# Altium PCB PCB5.PcbDoc
Units mm, origin at the board's own origin, x right, y up, seen from the top; angles counter-clockwise.
Board outline 22 x 21.75 mm, 2 copper layers (Top Layer, Bottom Layer); 20 components, 13 nets, 57 pads, 6 vias.
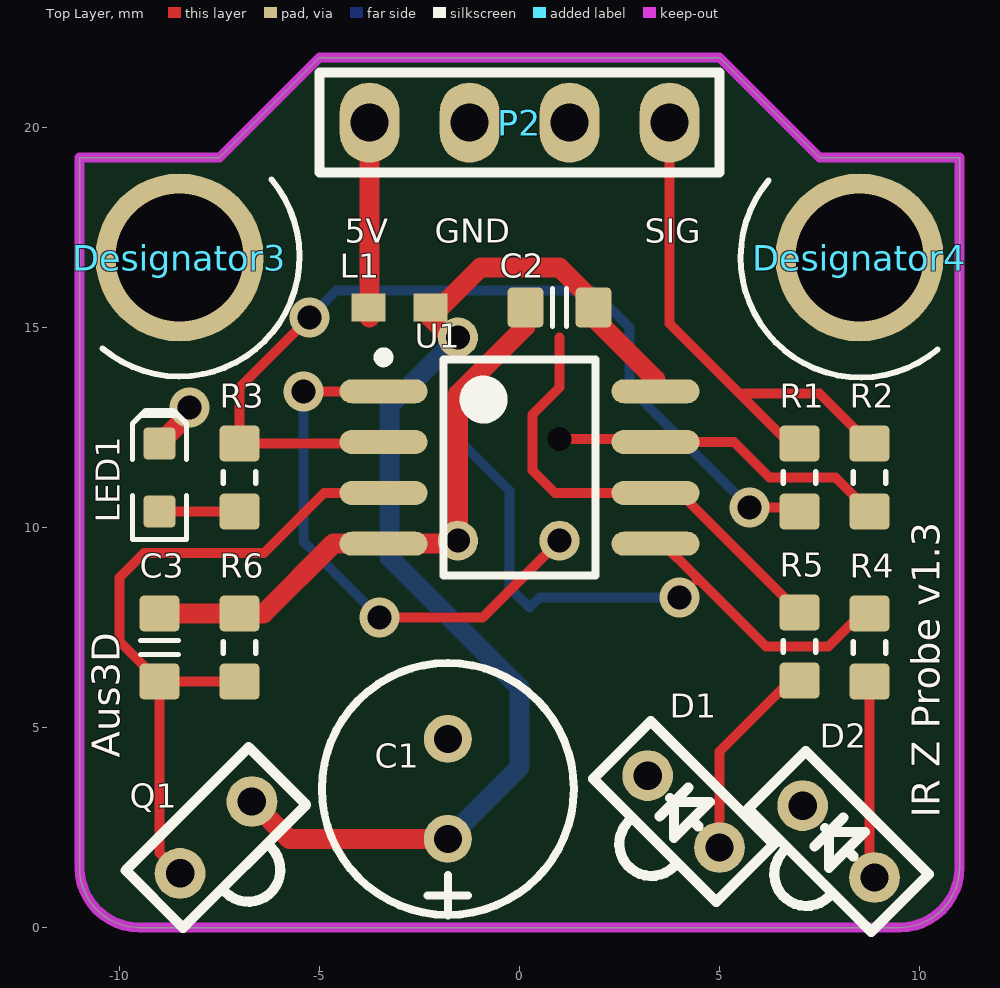
[diagram p0: Top Layer view]
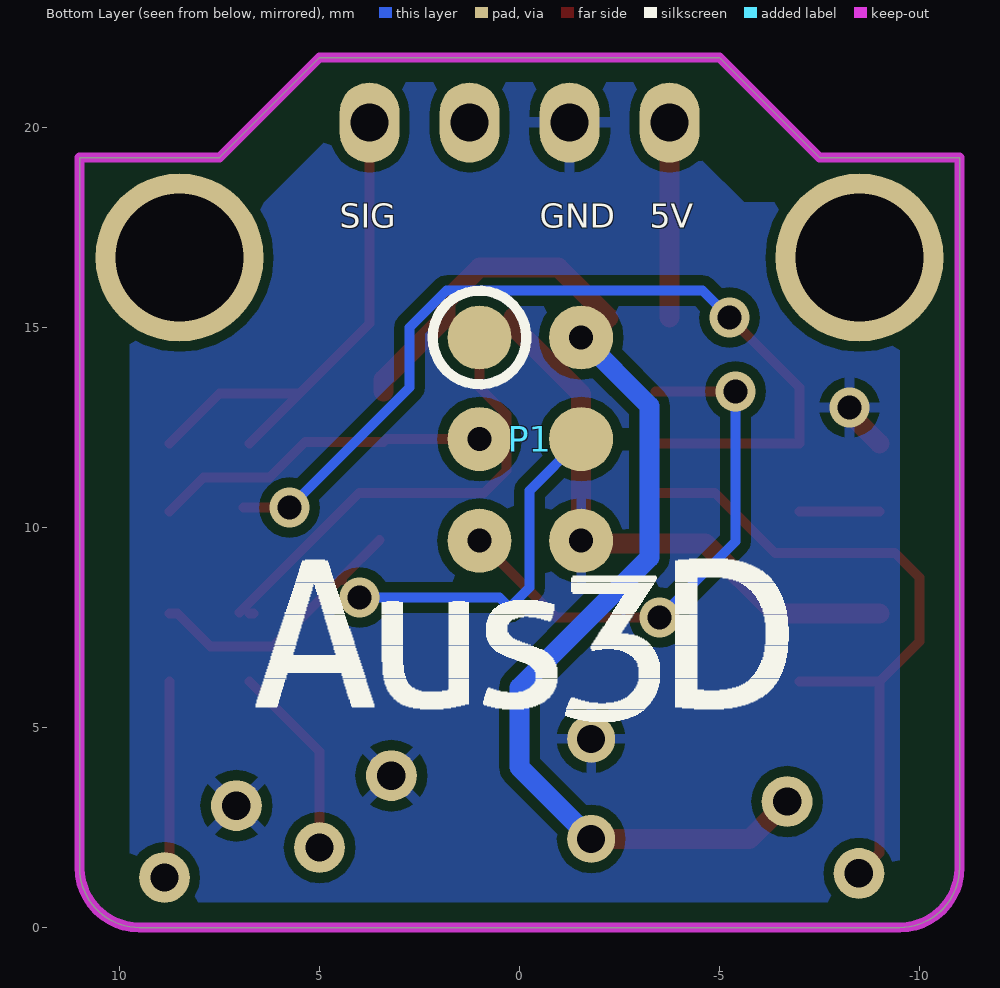
[diagram p1: Bottom Layer view, seen from below]

## Layer stack, top to bottom
Top Solder: solder mask 0.0102, Solder Resist, Dk 3.5
Top Layer: signal copper 0.0356
Dielectric1: dielectric 0.32, FR-4, Dk 4.8
Bottom Layer: signal copper 0.0356
Bottom Solder: solder mask 0.0102, Solder Resist, Dk 3.5

## Board outline
-11,1.5 ccw(c-9.5,1.5) -9.5,0 9.5,0 ccw(c9.5,1.5) 11,1.5 11,19.25 7.5,19.25 5,21.75 -5,21.75 -7.5,19.25 -11,19.25

## Design rules (kind name [scope] priority, off if disabled: settings)
Clearance [All] p1: gap=0.25
FabricationTestPointUsage TestPointUsage [All] p1: valid=0 allowmultiple=FALSE
FabricationTestpoint Testpoint [All] p1: side=3 testpointundercomponent=TRUE minsize=1.016 maxsize=2.54 preferedsize=1.524 minholesize=0 maxholesize=1.016 preferedholesize=0.813 testpointgrid=0.025 allowsidetop=TRUE allowsidebottom=TRUE usegrid=TRUE gridtolerance=0
HoleSize [All] p1: absolutevalues=TRUE maxlimit=4 minlimit=0.025 maxpercent=80.000 minpercent=20.000
PolygonConnect [All] p1: connectstyle=Relief reliefconductorwidth=0.254 reliefentries=4 polygonreliefangle="90 Angle" airgapwidth=0.254
RoutingVias [All] p1: holewidth=0.6 width=1 viastyle="Through Hole" minholewidth=0.6 minwidth=1 maxholewidth=0.6 maxwidth=1
SilkToSolderMaskClearance SilkscreenOverComponentPads [IsPad] p1: minsilkscreentomaskgap=0.254 clearancetoexposedcopper=TRUE
SolderMaskExpansion [All] p1: expansion=0.102
Width Width_Power [(InNet('5V') OR InNet('GND') OR InNet('VCC'))] p1: maxlimit=0.5 minlimit=0.5 preferedwidth=0.5 minimp=50.000000 maximp=50.000000 favimp=50.000000
Width [All] p2: maxlimit=0.25 minlimit=0.2 preferedwidth=0.25 minimp=50.000000 maximp=50.000000 favimp=50.000000
26 further rules are at their usual default settings.

## Classes and differential pairs
component class board1: C1 C2 C3 D1 D2 L1 LED1 P1 P2 Q1 R1 R2 R3 R4 R5 R6 U1

## Components (designator, comment, footprint, x,y, rotation, side; value= is the part's Value field where it differs from the comment)
C1 "100µ" 6.3-DIA-CAP -1.792,4.715 r270 top
C2 "100n" CAPC1608X90N 1,15.5 r0 top
C3 "1n" CAPC1608X90N -9,7 r90 top
D1 "GL480E" LED-2.54spacing 5,2 r135 top
D2 "GL480E" LED-2.54spacing 8.875,1.25 r135 top
Designator3 "Comment" M3-Hole -8.5,16.75 r0 top
Designator4 "Comment" M3-Hole 8.5,16.75 r270 top
L1 "7447965" SMD-0603 -3,15.5 r0 top
LED1 "Red" LED-0603-RED -9,11.25 r90 top
P1 "ICSP" "ICSP Pads - SMD" 1,14.75 r180 bottom
P2 "Header 4" JST-4P 3.75,20.125 r180 top
Q1 "SFH3100F" SFH3100F-footprint -6.69,3.15 r225 top
R1 "Thick Film" RESC1608X55N 7,11.25 r270 top
R2 "Thick Film" RESC1608X55N 8.75,11.25 r270 top
R3 "Thick Film" RESC1608X55N -7,11.25 r270 top
R4 "Thick Film" RESC1608X55N 8.75,7 r90 top
R5 "Thick Film" RESC1608X55N 7,7.025 r90 top
R6 "Thick Film" RESC1608X55N -7,7 r270 top
U1 "ATtiny45-20SH" 8S2_N 0,11.5 r0 top
? "" AUS3D-LOGO-BACK 0.25,7 r0 top

## Footprints (in the part's own frame and the unit in brackets; to place one, negate y for a bottom-side part, rotate by r counter-clockwise, add the part's x,y. Pads: shape width x height; smd on the part's side, far side on the other; paste and mask are expansions set on the pad)
6.3-DIA-CAP [mm]
  round 1.2 hole 0.7: 1(2.5,0) 2(0,0)
  silkscreen extent -1.9,-3.15 4.42,3.15
8S2_N [mm] "SOP, 8-Leads, Body 5.3x5.3mm, Pitch 1.27mm, IPC Medium Density"
  oval 2.2x0.6 smd: 1(-3.4,1.905) 2(-3.4,0.635) 3(-3.4,-0.635) 4(-3.4,-1.905) 5(3.4,-1.905) 6(3.4,-0.635) 7(3.4,0.635) 8(3.4,1.905)
  silkscreen extent -3.52,-2.7 1.9,2.88, body extent -2.7,-2.68 2.7,2.68, height 2.16
AUS3D-LOGO-BACK [mm]
CAPC1608X90N [mm] "Chip Capacitor, Body 1.6x0.8mm, EIA 0603, IPC Medium Density"
  round 0.254 on Mech15: 0(0,0)
  rrect25% 0.9x1 smd: 1(-0.85,0) 2(0.85,0)
  Top Layer pour cut-out: -0.6,0.5 -0.4,0.7 0.4,0.7 0.6,0.5 0.6,-0.5 0.4,-0.7 -0.4,-0.7 -0.6,-0.5
  silkscreen extent -0.18,-0.48 0.18,0.48, body extent -0.85,-0.45 0.85,0.45, height 0.89
"ICSP Pads - SMD" [mm]
  round 1.6 / inner round 1.6 / far side round 0 all layers, no hole: 1(0,0) 4(2.54,-2.54)
  round 1.6 / inner round 1.6 / far side round 1 hole 0.6: 2(2.54,0) 5(0,-5.08) 6(2.54,-5.08)
  round 1.6 / inner round 1.6 / far side round 0 hole 0.6: 3(0,-2.54)
  silkscreen extent -1.17,-1.17 1.17,1.17
JST-4P [mm]
  oval 1.5x2 hole 0.95: 1(0,0) 2(2.5,0) 3(5,0) 4(7.5,0)
  silkscreen extent -1.25,-1.25 8.75,1.25
LED-2.54spacing [mil]
  round 50 hole 28: 1(100,0) 2(0,0)
  silkscreen extent -35,-40 136,76
LED-0603-RED [mm]
  round 0.254 on Mech15: 0(0,0)
  rrect25% 0.8x0.8 smd: A(-0.85,0) K(0.85,0)
  Top Layer pour cut-out: -0.5,0.5 0.5,0.5 0.5,-0.5 -0.5,-0.5
  silkscreen extent -1.55,-0.67 1.68,0.67, body extent -0.8,-0.4 0.8,0.4, height 0.75
M3-Hole [mm]
  round 4.2 hole 3.2: M3(0,0)
  silkscreen extent -1.93,-2.97 3,1.96
RESC1608X55N [mm] "Chip Resistor, Body 1.6x0.8mm, EIA 0603, IPC Medium Density"
  round 0.254 on Mech15: 0(0,0)
  rrect25% 0.9x1 smd: 1(-0.85,0) 2(0.85,0)
  Top Layer pour cut-out: -0.6,0.5 -0.4,0.7 0.4,0.7 0.6,0.5 0.6,-0.5 0.4,-0.7 -0.4,-0.7 -0.6,-0.5
  silkscreen extent -0.15,-0.41 0.15,0.41, body extent -0.87,-0.47 0.88,0.48, height 0.54
SFH3100F-footprint [mil]
  round 50 hole 28: 1(0,0) 2(100,0)
  silkscreen extent -35,-40 136,76
SMD-0603 [mm] "Chip Inductor, 2-Leads, Body 1.6x0.8mm"
  rect 0.85x0.7 smd: 1(-0.775,0) 2(0.775,0)
  body extent -0.8,-0.4 0.8,0.4, height 0.95

## Part data
C1: library part CAPE_100u_16V_THD, "Capacitor THD Electrolytic 100uF 20% 16V Radial"
C2: library part CAPC_100n_0402_X5R_16V_10%, "Capacitor SMD Cer 100nF 10% 16V X5R 0402"
C3: library part CAPC_1n_0402_X7R_16V_10%, "Capacitor SMD Cer 1nF 10% 16V X7R 0402"
L1: "SMD-Multilayer Inductor WE-MI, L = 1.00 µH"
LED1: library part LED_SMD_Red_0603_220mcd, "LED 0603 SMD Hyper Red 630nm 220mcd 20mA"
P1: library part "Header 3X2", "Header, 3-Pin, Dual row"
P2: "Header, 4-Pin"
Q1: "GL480E"
R1 R2 R4 R5 R6: library part RES_2K2_0603_5%, "Resistor SMD chip 2.2k Ohm 0.1W 5% 0603"
R3: library part RES_330R_0603_5%, "Resistor SMD chip 330 Ohm 0.1W 5% 0603"
U1: "8-bit AVR Microcontroller, 20MHz, 2.7-5.5V, 4K Flash, 256 Bytes EEPROM, 256 Bytes SRAM, Industrial Grade (-40°C to 85°C), 8-Lead SOIC, Pb-Free"

## Via types
v1: diameter 1, hole 0.6, Top Layer to Bottom Layer, 6 vias

## Nets (pads, with @x,y where several pads share a name; then routed paths per layer and width w, separated by ;. In a path a pad name is that pad's centre, name@x,y a point inside that pad or via, vN(x,y) a via of type N, cw(c..) or ccw(c..) an arc to the next point about the centre after c; other vN are vias at no path point)
5V: C1.1 C2.2 L1.2 P1.2 Q1.1 U1.8 | length 29.2
  Top Layer w0.5: Q1.1 -5.755,2.215 C1.1 ; P1.2@-1.725,14.75 -2.225,15.25 -0.975,16.5 1,16.5 1.85,15.65 1.85,15.25 3.4,13.7 U1.8
  Bottom Layer w0.5: C1.1 0,4.007 0,6 -3.25,9.25 -3.25,13.04 P1.2
GND: C1.2 C2.1 C3.2 D1.1 D2.1 LED1.K P1.6 P2.3 R6.1 U1.4 | length 16
  Top Layer w0.5: C3.2 -6.4,7.85 -4.655,9.595 U1.4 -1.615,9.595 P1.6 -1.54,13.336 0.15,15.026 C2.1@0.15,15.25 ; LED1.K -8.25,12.85 v1(-8.25,13) ; C1.2@-2.115,4.715 C1.2
NetC3_1: C3.1 Q1.2 R6.2 U1.3 | length 17.5
  Top Layer w0.25: Q1.2 -9,1.868 C3.1 ; R6.2 C3.1 ; U1.3 -4.885,10.865 -6.385,9.365 -9.385,9.365 -10,8.75 -10,7.15 C3.1
NetD1_2: D1.2 R5.1 | length 4.9
  Top Layer w0.25: D1.2 5,4.4 R5.1@6.75,6.15
NetD2_2: D2.2 R4.1 | length 5
  Top Layer w0.25: R4.1 8.75,1.375 D2.2
NetLED1_A: LED1.A R3.2 | length 2
  Top Layer w0.25: LED1.A R3.2
NetP1_1: P1.1 R5.2 U1.6 | length 11.9
  Top Layer w0.25: P1.1 1,13.5 0.325,12.825 0.325,11.425 0.885,10.865 U1.6 4.01,10.865 R5.2 ; R5.2@6.65,7.85 R5.2@6.75,7.85
NetP1_3: P1.3 R2.2 U1.7 | length 8.5
  Top Layer w0.25: P1.3 3.325,12.21 U1.7 5.365,12.135 6.25,11.25 7.9,11.25 R2.2
NetP1_4: P1.4 R4.2 U1.5 | length 15.6
  Top Layer w0.25: U1.5@3.495,9.69 4.436,8.75 ; 4.436,8.686 4.436,8.75 ; R4.2 8.55,7.85 7.725,7.025 6.161,7.025 4.436,8.75
  Bottom Layer w0.25: P1.4 -0.25,10.92 -0.25,8.5 0.25,8 0.5,8.25 v1(4,8.25)
NetP1_5: P1.5 U1.1 | length 13.7
  Top Layer w0.25: v1(-5.4,13.405) U1.1 ; v1(-3.5,7.75) -0.92,7.75 P1.5
  Bottom Layer w0.25: v1(-5.4,13.405) -5.4,9.65 v1(-3.5,7.75)
NetR1_2: R1.2 R3.1 U1.2 | length 23
  Top Layer w0.25: v1(-5.25,15.25) -7,13.5 R3.1 -3.435,12.1 U1.2 ; v1(5.75,10.5) R1.2@6.9,10.5
  Bottom Layer w0.25: v1(-5.25,15.25) -4.575,15.925 1.825,15.925 2.75,15 2.75,13.5 v1(5.75,10.5)
SIG: P2.1 R1.1 R2.1 | length 13
  Top Layer w0.25: P2.1 3.75,15.1 5.5,13.35 ; R1.1@6.75,12.1 5.5,13.35 ; R2.1 7.5,13.35 5.5,13.35
VCC: L1.1 P2.4 | length 4.9
  Top Layer w0.5: L1.1@-3.75,15.25 P2.4
pads on no net: C2.0 C3.0 Designator3.M3 Designator4.M3 LED1.0 P2.2 R1.0 R2.0 R3.0 R4.0 R5.0 R6.0

## Polygon pours and split planes (outlines as drawn)
GND on Bottom Layer "GND - BottomLayer" (solid, remove dead copper, pour order 2): -9.5,18.126 -9.5,0.626 9.75,0.626 9.75,18.126 6.384,18.126 4.384,20.126 4.384,21.126 -3.616,21.126 -3.616,20.126 -5.616,18.126
5V on Top Layer "VCC - TopLayer" (solid, remove dead copper, pour order 4): 19.127,24.51 17.502,22.885 17.502,19.385 17.502,17.385 20.127,17.385 20.127,21.051 20.991,21.915 21.002,21.926 21.002,22.76 21.002,22.885 19.252,24.635

## Keep-outs
Keep-Out Layer:
  the board outline again, w0.254

## Silkscreen, mask and mechanical layers (free items; w line width, h text height)
Top Overlay:
  text "5V" at -4.375,17.125 h0.6
  text "GND" at -2.125,17.125 h0.6
  text "SIG" at 3.125,17.125 h0.6
  text "Aus3D" at -10,4.25 h0.7 r90
  text "IR Z Probe v1.3" at 10.5,2.75 h0.7 r90
Bottom Overlay:
  text "5V" at -3.25,17.5 h0.6
  text "GND" at -0.5,17.5 h0.6
  text "SIG" at 4.5,17.5 h0.6
Mechanical 16:
  drawing of 1874 lines, arcs and shapes, not listed
  text "1" at -113.129,98.861 h0.6
  text "2" at -40.485,98.861 h0.6
  text "3" at 32.667,98.861 h0.6
  text "4" at 105.565,98.861 h0.6
  text "A" at -147.47,75.849 h0.6
  text "A" at 139.55,75.849 h0.6
  text "B" at -147.47,27.792 h0.6
  text "B" at 139.55,27.792 h0.6
  text "C" at -147.47,-20.722 h0.6
  text "C" at 139.55,-20.722 h0.6
  text "ENGINEER:" at 24.615,-57.73 h0.6
  text "TITLE:" at 62.715,-57.73 h0.6
  text "PCB DESIGNER:" at 24.615,-65.223 h0.6
  text "D" at -147.47,-68.728 h0.6
  text "D" at 139.55,-68.728 h0.6
  text "DATE:" at 24.615,-72.97 h0.6
  text "PART NO.:" at 62.715,-72.97 h0.6
  text "REV:" at 116.055,-72.97 h0.6
  text "Altium Limited" at -8.405,-75.51 h0.6
  text ".PRINT_DATE" at 25.885,-76.018 h0.6
  text "12a Rodborough Rd" at -8.405,-78.05 h0.6
  text "Frenchs Forest" at -8.405,-80.59 h0.6
  text "FILE NAME:" at 24.615,-80.59 h0.6
  text "DWG NO:" at 62.715,-80.59 h0.6
  text "SCALE:" at 116.055,-80.59 h0.6
  text "NSW 2086" at -8.405,-83.13 h0.6
  text ".PCB_FILE_NAME_NO_PATH" at 25.885,-83.638 h0.6
  text "1" at -113.129,-89.099 h0.6
  text "2" at -40.485,-89.099 h0.6
  text "3" at 32.667,-89.099 h0.6
  text "4" at 105.565,-89.099 h0.6